# Altium PCB 5V_circuit.PcbDoc
Units mil, origin at the board's own origin, x right, y up, seen from the top; angles counter-clockwise.
Board outline 6000 x 4000 mil, 4 copper layers (Top Layer 1, GND, 5V, Bottom Layer 1), stack 24.312 mil thick; 8 components, 8 nets, 28 pads, 0 vias.
Unrouted connection lines stored in the file: 13.
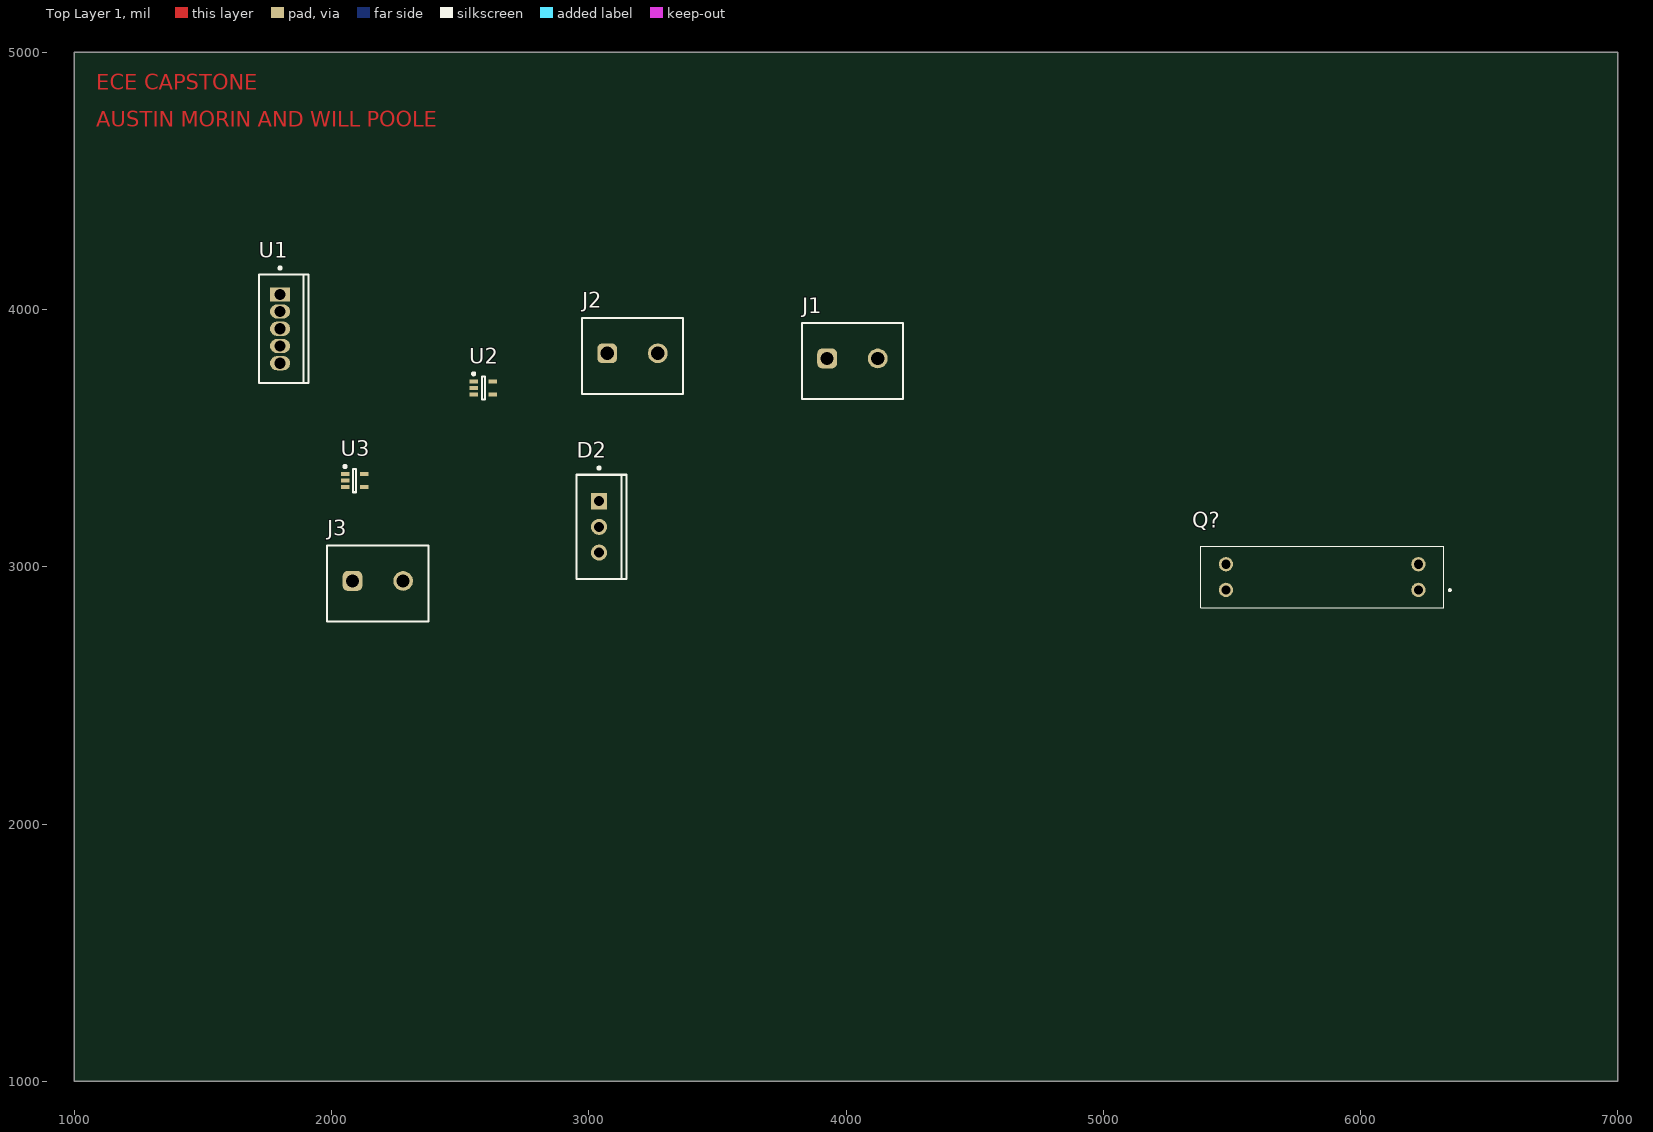
[diagram p0: Top Layer 1 view]
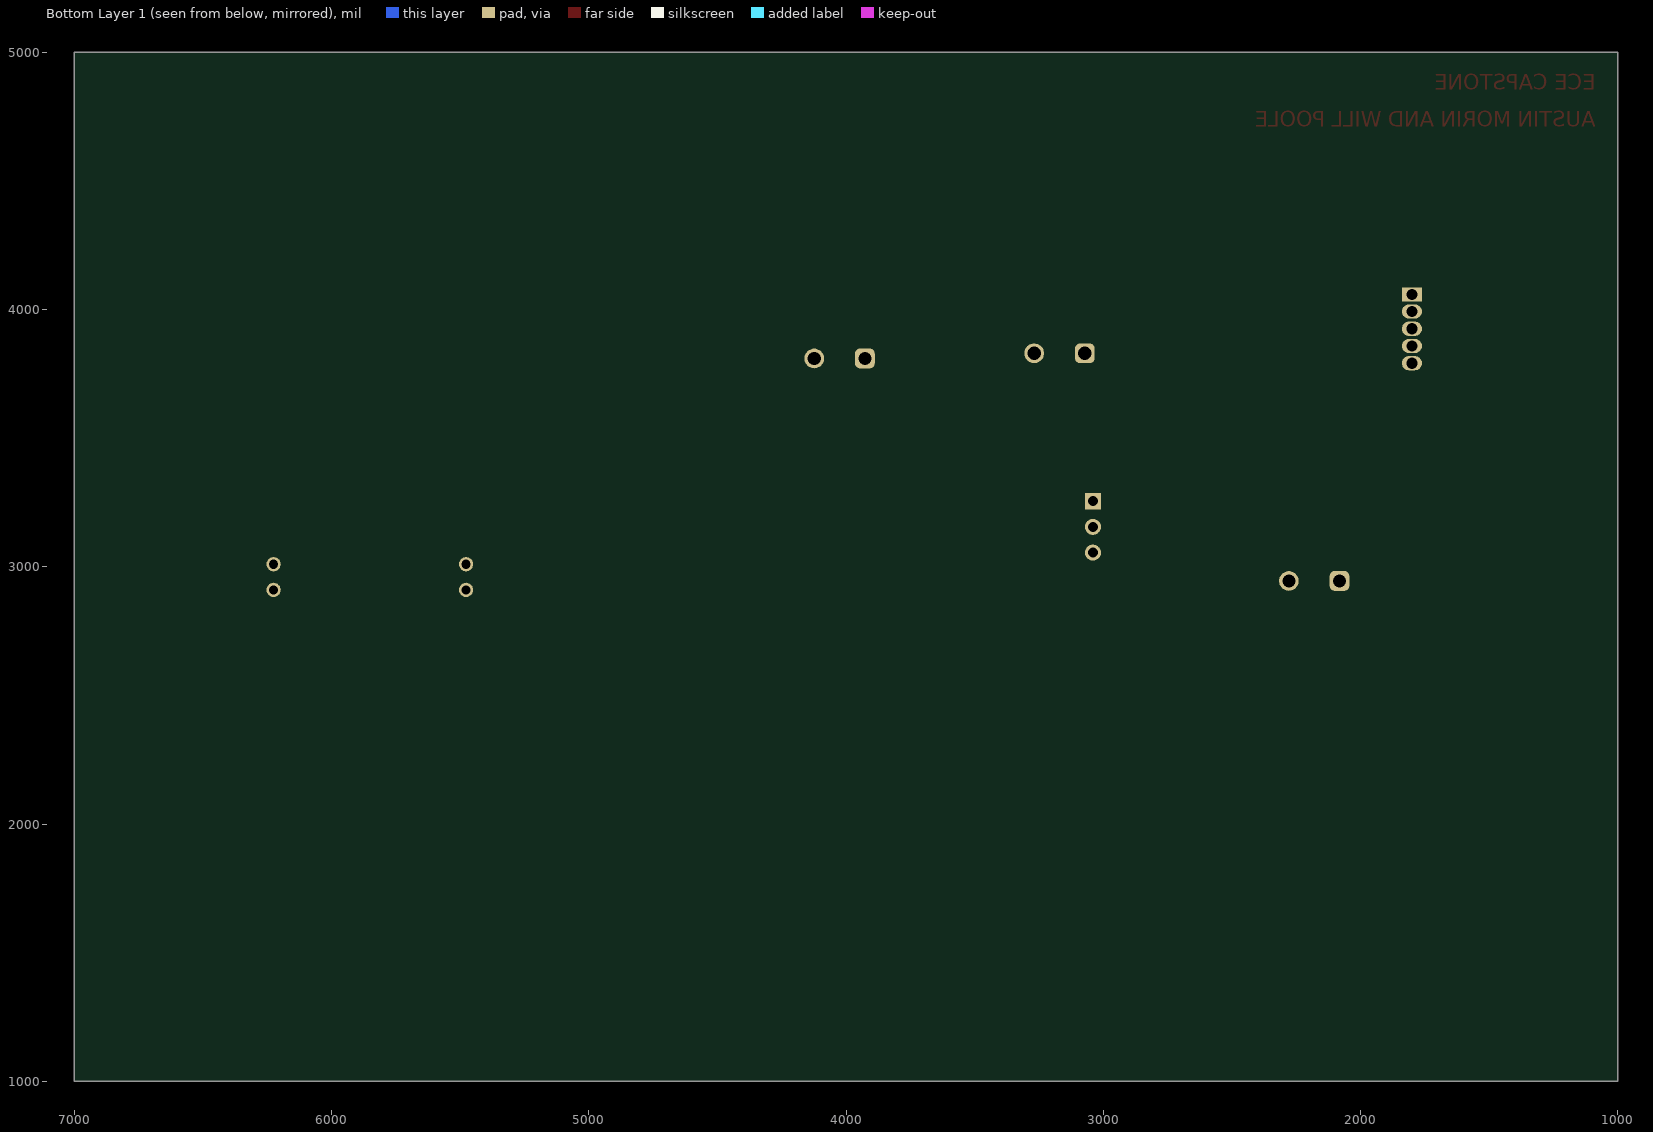
[diagram p1: Bottom Layer 1 view, seen from below]
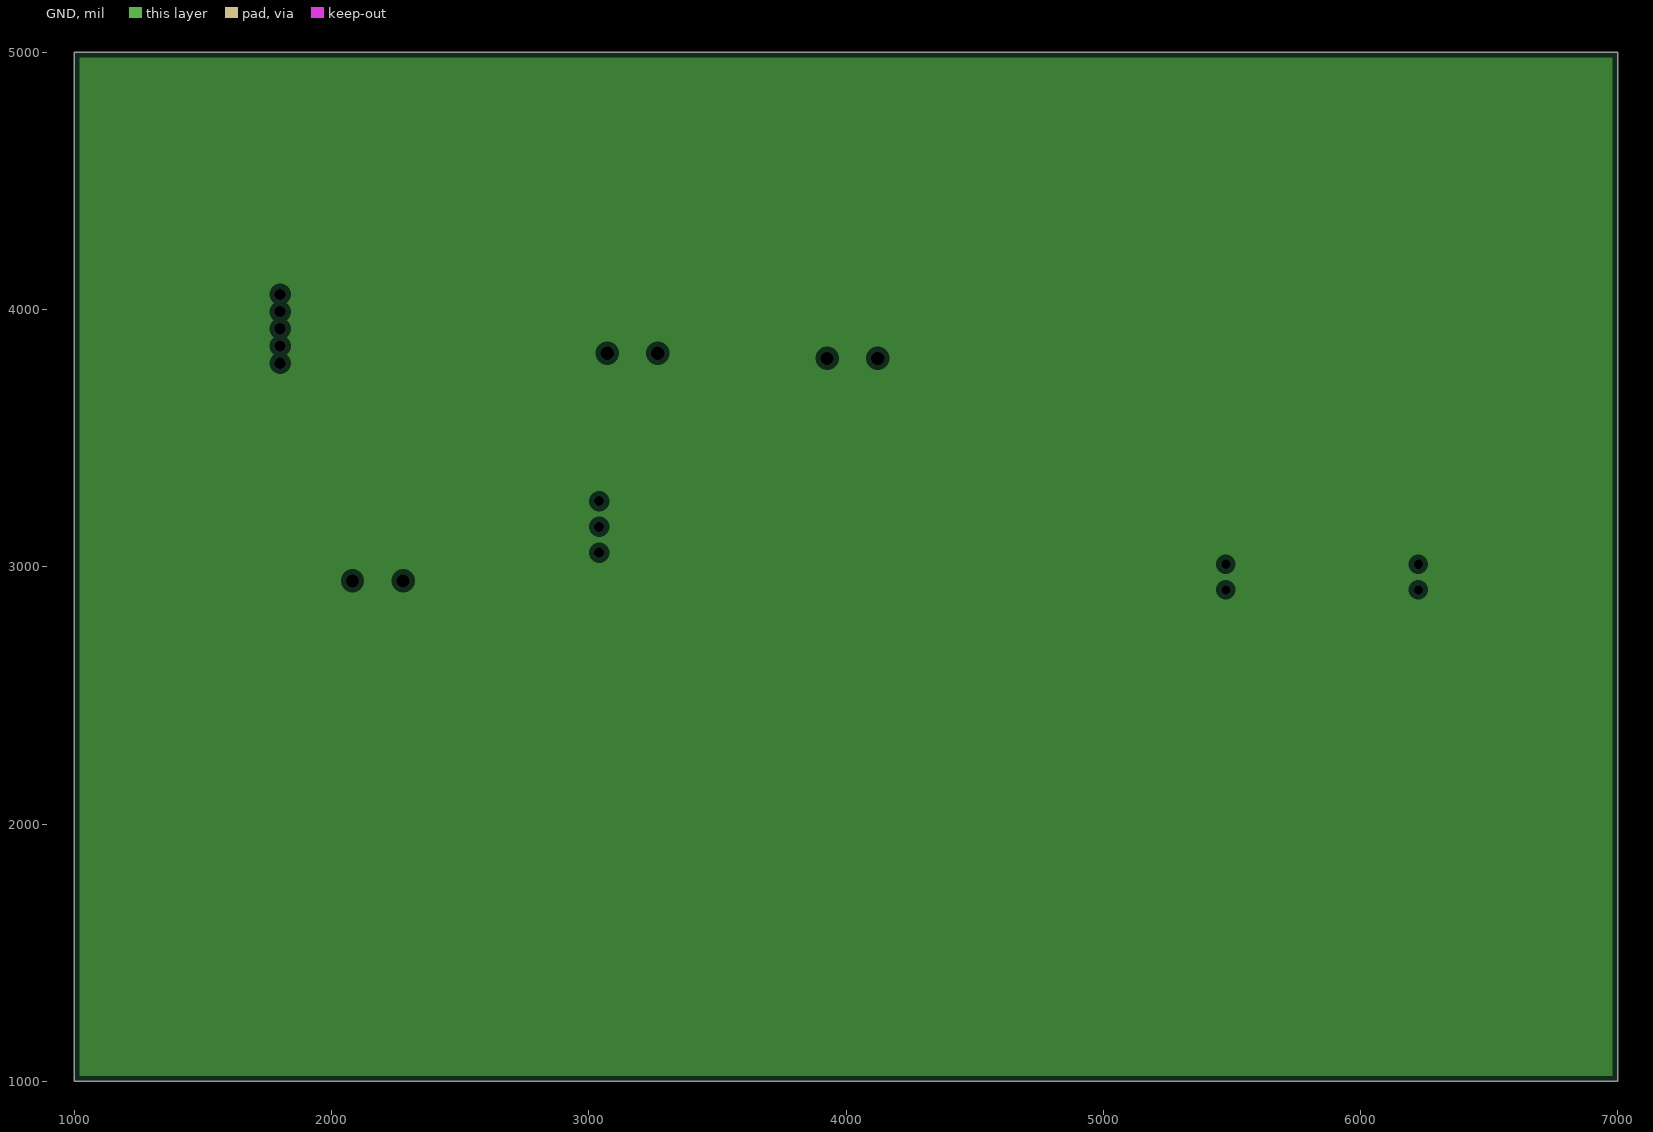
[diagram p2: GND, clearances drawn from the general rule]
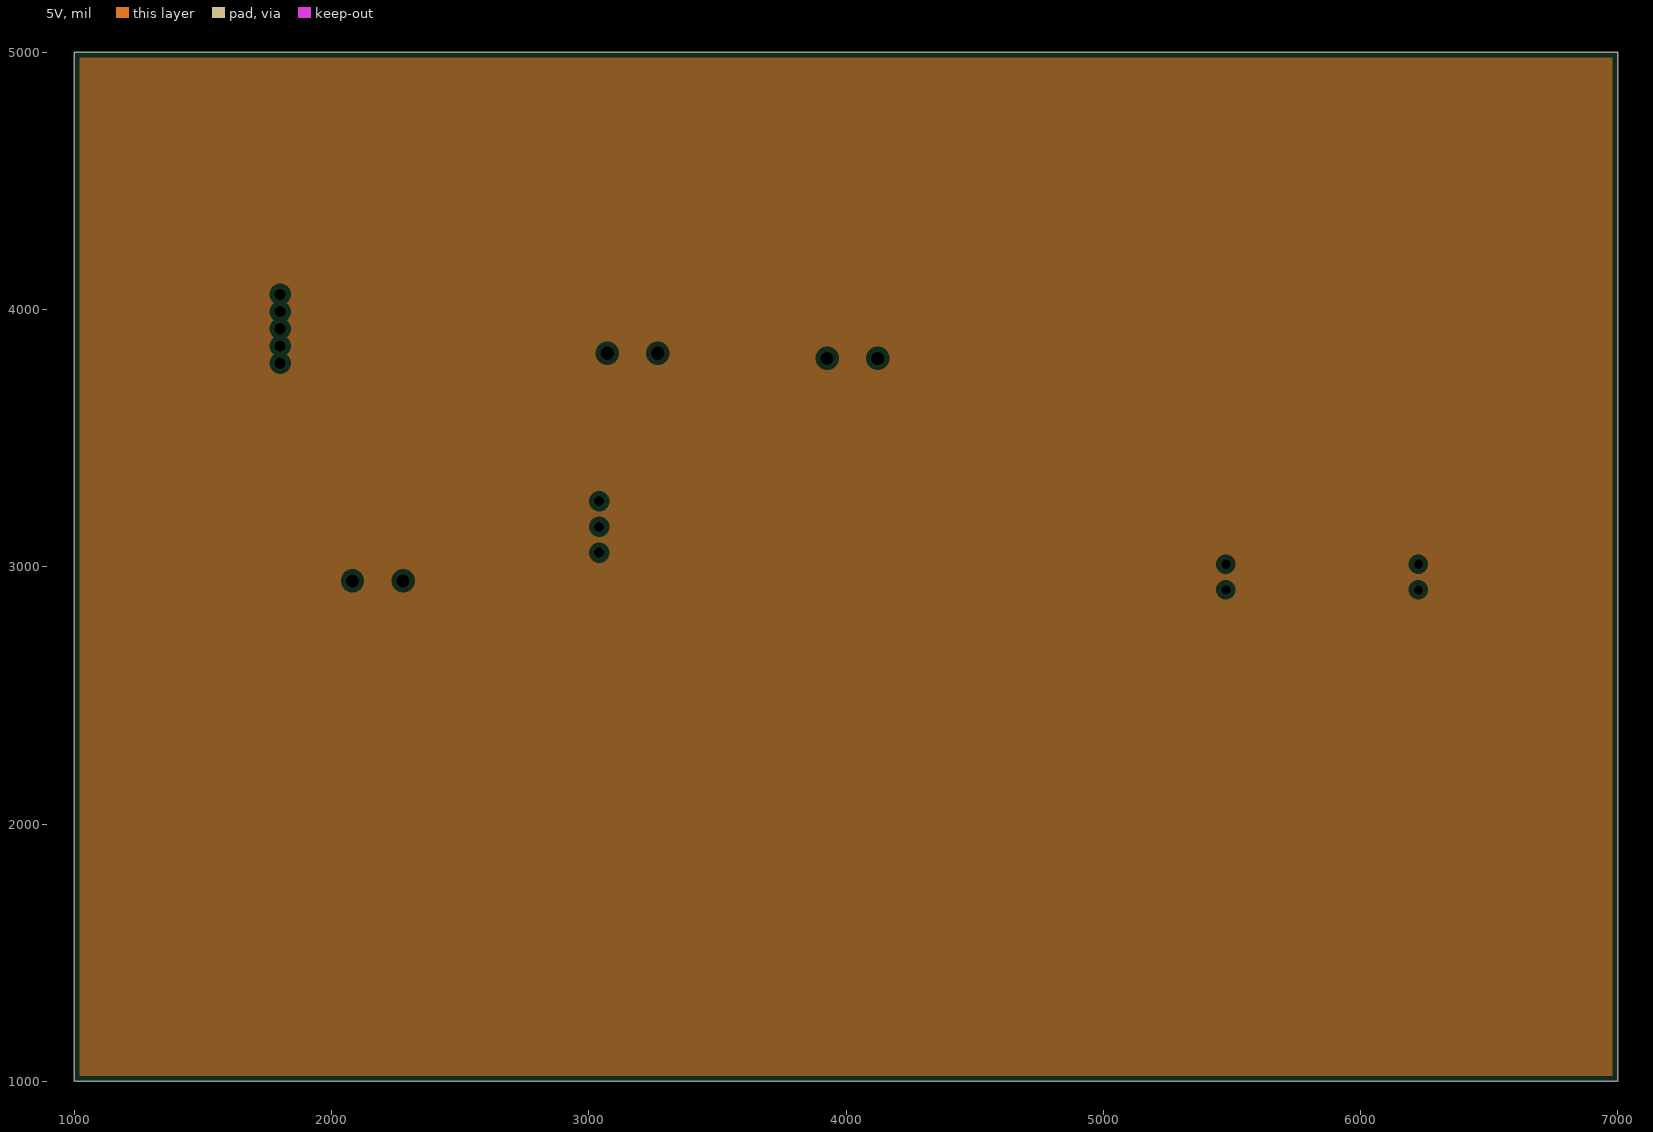
[diagram p3: 5V, clearances drawn from the general rule]

## Layer stack, top to bottom
Top Solder: solder mask 0.4, Solder Resist, Dk 3.5
Top Layer 1: signal copper 1.378
Dielectric 2: core 8, Core-025, Dk 4.6
GND: plane copper 1.378
Dielectric 1: prepreg 2.8, PP-006, Dk 4.1
5V: plane copper 1.378
Dielectric 3: core 8, Core-025, Dk 4.6
Bottom Layer 1: signal copper 1.378
Bottom Solder: solder mask 0.4, Solder Resist, Dk 3.5

## Board outline
1000,1000 7000,1000 7000,5000 1000,5000

## Design rules (kind name [scope] priority, off if disabled: settings)
Clearance [All] p1: gap=10 ignorepadtopadclearanceinfootprint=FALSE
MinimumSolderMaskSliver [All] p1 off: minsoldermaskwidth=10
PlaneClearance [All] p1: clearance=20
PlaneConnect [All] p1: planeconnectstyle=Relief reliefexpansion=20 reliefentries=4 reliefconductorwidth=10 reliefairgap=10
PolygonConnect [All] p1: connectstyle=Relief reliefconductorwidth=10 reliefentries=4 polygonreliefangle="90 Angle" airgapwidth=10
RoutingVias [All] p1: holewidth=28 width=50 viastyle="Through Hole" minholewidth=28 minwidth=50 maxholewidth=28 maxwidth=50
SilkToSilkClearance [All] p1 off: silktosilkclearance=10
SilkToSolderMaskClearance [IsPad] p1 off: minsilkscreentomaskgap=10 clearancetoexposedcopper=TRUE
SolderMaskExpansion [All] p1: expansion=8 istentingtop=FALSE
Width [All] p1: maxlimit=10 minlimit=10 preferedwidth=10
25 further rules are at their usual default settings.

## Classes and differential pairs
component class SMALL: D1
component class BIG: U1

## Components (designator, comment, footprint, x,y, rotation, side; value= is the part's Value field where it differs from the comment)
D2 "MCR8SNG" ONSC-TO-220-3-221A-09_AF 3040,3155 r0 top
J1 "691137710002" 691137710002 4025,3800 r0 top
J2 "691137710002" 691137710002 3170,3820 r0 top
J3 "691137710002" 691137710002 2180,2935 r0 top
Q? "LTH-301-32" LTH30132 5865,2960 r180 top
U1 "TPS75901KCG3" TI-KC5 1800,3925 r0 top
U2 "MCP6566T-E/LT" SC70-LT5_N 2590,3695 r0 top
U3 "MCP6566T-E/LT" SC70-LT5_N 2090,3335 r0 top

## Footprints (in the part's own frame and the unit in brackets; to place one, negate y for a bottom-side part, rotate by r counter-clockwise, add the part's x,y. Pads: shape width x height; smd on the part's side, far side on the other; paste and mask are expansions set on the pad)
691137710002 [mm] "Horizontal Cable Entry with Pressure Clamp, pitch 5mm, 02p"
  rrect50% 1.95x1.95 hole 1.3: 1(-2.5,0.25)
  round 1.95 hole 1.3: 2(2.5,0.25)
  silkscreen extent -5,-3.75 5,3.75, body extent -5,-3.75 5,3.75, height 11.6
LTH30132 [mm]
  round 1.416 hole 0.91: 1(-9.15,1.27) 2(-9.15,-1.27) 3(9.85,-1.27) 4(9.85,1.27)
  silkscreen extent -12.35,-3.05 12.35,3.05, body extent -11.65,-3.05 12.35,3.05, height 16.1
ONSC-TO-220-3-221A-09_AF [mm] "FM, 3-Leads, Body 10.3x4.85mm, Pitch 2.54mm"
  rect 1.6x1.6 hole 1: 1(0,2.54)
  round 1.6 hole 1: 2(0,0) 3(0,-2.54)
  silkscreen extent -2.2,-5.15 2.7,5.92, body extent -2.18,-5.15 2.67,5.15, height 19.68
SC70-LT5_N [mm] "SOT353, 5-Leads, Body 2x1.3mm, Pitch 0.65mm, Lead Span 2.1mm, IPC Medium Density"
  rect 0.85x0.4 smd: 1(-0.95,0.65) 2(-0.95,0) 3(-0.95,-0.65) 4(0.95,-0.65) 5(0.95,0.65)
  silkscreen extent -1.07,-1.15 0.15,1.52, body extent -0.67,-1.12 0.68,1.13, height 1.1
TI-KC5 [mm] "FM, 5-Leads, Body 10.16x8.46mm, Pitch 1.7mm,"
  rect 2x1.4 hole 1.1: 1(0,3.405)
  oval 2x1.4 hole 1.1: 2(0,1.705) 3(0,0.005) 4(0,-1.695) 5(0,-3.395)
  silkscreen extent -2.1,-5.35 2.8,6.12, body extent -2.08,-5.35 2.77,5.35, height 16.51

## Part data
D2: library part CMP-1068-00111-1, "Sensitive Gate Silicon Controlled Rectifier, Reverse Blocking Thyristor, 0.2 mA, 3-Pin TO-220, Pb-Free, Tube", Manufacturer="On Semiconductor", ComponentLink1Description="Manufacturer URL", ComponentLink1URL=http://www.onsemi.com/, ComponentLink2Description=Datasheet, ComponentLink2URL=http://www.onsemi.cn/pub_link/Collateral/MCR8S-D.PDF, ComponentLink3Description="Package Specification", ComponentLink3URL=http://www.onsemi.cn/pub_link/Collateral/MCR8S-D.PDF, DatasheetVersion="Rev. 4", IGT Max (mA)=0.2, IT(RMS) Max (A)=8, ITSM Max (A)=80, Mounting Technology="Through Hole", PackageDescription="3-Pin Flange Mount, Vertical Straight Lead, Body 9.97 x 4.445 mm, Pitch 2.54 mm", PackageReference=TO-220-3-221A-09_AF, PackageVersion="Rev. AF", Packing=Tube, PartNumber=MCR8SNG, RoHS=Pb-Free
J1: library part CMP-1502-03324-2, Current Rating=16A, Max Operating Temperature=120°C, Min Operating Temperature=-30°C, Supplier Part Number 1=732-10955-ND, Voltage Rating=300V, Contact Material="Nickel, Tin", Height=11.6mm, Lead Pitch=5mm, NexarPartId=78871135, Number of Contacts=2, Number of Pins=2, Number of Rows=1, Packaging=Box, RoHS=Non-Compliant, Supplier 1=Digi-Key
J2 J3: library part CMP-1502-03324-2, Current Rating=16A, Max Operating Temperature=120°C, Min Operating Temperature=-30°C, Voltage Rating=300V, Contact Material="Nickel, Tin", Height=11.6mm, Lead Pitch=5mm, NexarPartId=78871135, Number of Contacts=2, Number of Pins=2, Number of Rows=1, Packaging=Box, RoHS=Non-Compliant
Q?: "Phototransistor", Manufacturer_Name=Lite-On, Mouser Part Number=859-LTH-301-32, Arrow Part Number=LTH-301-32, Arrow Price/Stock=https://www.arrow.com/en/products/lth-301-32/lite-on-technology?region=nac, Datasheet Link=http://optoelectronics.liteon.com/upload/download/DS-55-96-0005/LTH-301-32DS.pdf, Height=16mm, Manufacturer_Part_Number=LTH-301-32, Mouser Price/Stock=https://www.mouser.co.uk/ProductDetail/Lite-On/LTH-301-32?qs=WxFF5lh7QM2oOLU3SLNnMA%3D%3D
U1: library part CMP-0395-00732-1, "Single Output Fast Transient Response LDO, 7.5 A, Adjustable 1.22 to 5 V Output, 2.8 to 5.5 V Input, 5-pin TO-220 (KC), -40 to 125 degC, Green (RoHS & no Sb/Br)", Manufacturer="Texas Instruments", Power Good=TRUE, Accuracy(%)=3, ComponentLink1Description="Manufacturer URL", ComponentLink1URL=http://www.ti.com/, ComponentLink2Description=Datasheet, ComponentLink2URL=http://www.ti.com/general/docs/lit/getliterature.tsp?genericPartNumber=TPS75901&fileType=pdf, ComponentLink3Description="Package Specification", ComponentLink3URL=http://www.ti.com/litv/pdf/msot008c, DatasheetVersion=SLVS318E, Eco-Plan="Green (RoHS & no Sb/Br)", Iout(Max)(A)=7.5, Iq(Typ)(mA)=0.12, Mounting Technology="Through Hole", PackageDescription="5-Pin Plastic Flange Mount", PackageReference=KC5, PackageVersion=4040208/F, PartNumber=TPS75901KCG3, SubFamily="Single Channel LDO", Vdo(Typ)(mV)=400, Vin(Max)(V)=5.5, Vin(Min)(V)=2.8, Vout Adj(Max)(V)=5, Vout Adj(Min)(V)=1.22
U2 U3: library part CMP-0187-00418-3, "None", Case/Package=SC, Input Bias Current=1pA, Input Offset Voltage (Vos)=10mV, Max Operating Temperature=125°C, Max Supply Current=130uA, Max Supply Voltage=5.5V, Min Operating Temperature=-40°C, Min Supply Voltage=1.8V, Operating Supply Voltage=5V, Output Current=50mA, Output Current per Channel=30mA, Package Quantity=3000, Power Supply Rejection Ratio (PSRR)=70dB, Common Mode Rejection Ratio=66dB, Height=1mm, Hysteresis=5mV, Lead Free="Lead Free", Length=2mm, Max Input Current=1pA, Mount="Surface Mount", Nominal Supply Current=130uA, Number of Amplifiers=1, Number of Channels=1, Number of Elements=1, Number of Pins=5, Output Compatibility=CMOS, Packaging="Tape and Reel", Propagation Delay=80ns, Quiescent Current=130uA, Radiation Hardening=No, REACH SVHC="No SVHC", Response Time=49ns, RoHS Compliant=Yes, Supply Current=130uA, Technology=CMOS, Termination=SMD/SMT, Turn-On Delay Time=56ns, Type="General Purpose", Width=1.25mm

## Nets (pads, with @x,y where several pads share a name; then routed paths per layer and width w, separated by ;. In a path a pad name is that pad's centre, name@x,y a point inside that pad or via, vN(x,y) a via of type N, cw(c..) or ccw(c..) an arc to the next point about the centre after c; other vN are vias at no path point)
GND: J2.1 U2.5 U3.5
NetD2_1: D2.1 U2.1
NetD2_2: D2.2 Q?.4 U3.3
NetD2_3: D2.3 J1.2
NetJ1_1: J1.1 U2.3 U3.1
NetJ2_2: J2.2 Q?.3 U2.2 U3.2
NetJ3_1: J3.1 U3.4
NetJ3_2: J3.2 U2.4
pads on no net: Q?.1 Q?.2 U1.1 U1.2 U1.3 U1.4 U1.5

## Polygon pours and split planes (outlines as drawn)
no net on GND (split plane): 6979.9,1020.1 1020.1,1020.1 1020.1,4979.9 6979.9,4979.9
no net on 5V (split plane): 6979.9,1020.1 1020.1,1020.1 1020.1,4979.9 6979.9,4979.9

## Other copper
Top Layer 1:
  text "ECE CAPSTONE" at 1085.25,4855.01 h60
  text "AUSTIN MORIN AND WILL POOLE" at 1085.25,4710.01 h60